# Altium PCB Mainboard.PcbDoc
Units mm, origin at the board's own origin, x right, y up, seen from the top; angles counter-clockwise.
Board outline 100.75 x 72.66 mm, 2 copper layers (Top Layer, Bottom Layer), stack 1.591 mm thick; 38 components, 40 nets, 176 pads, 22 vias.
Unrouted connection lines stored in the file: 1.
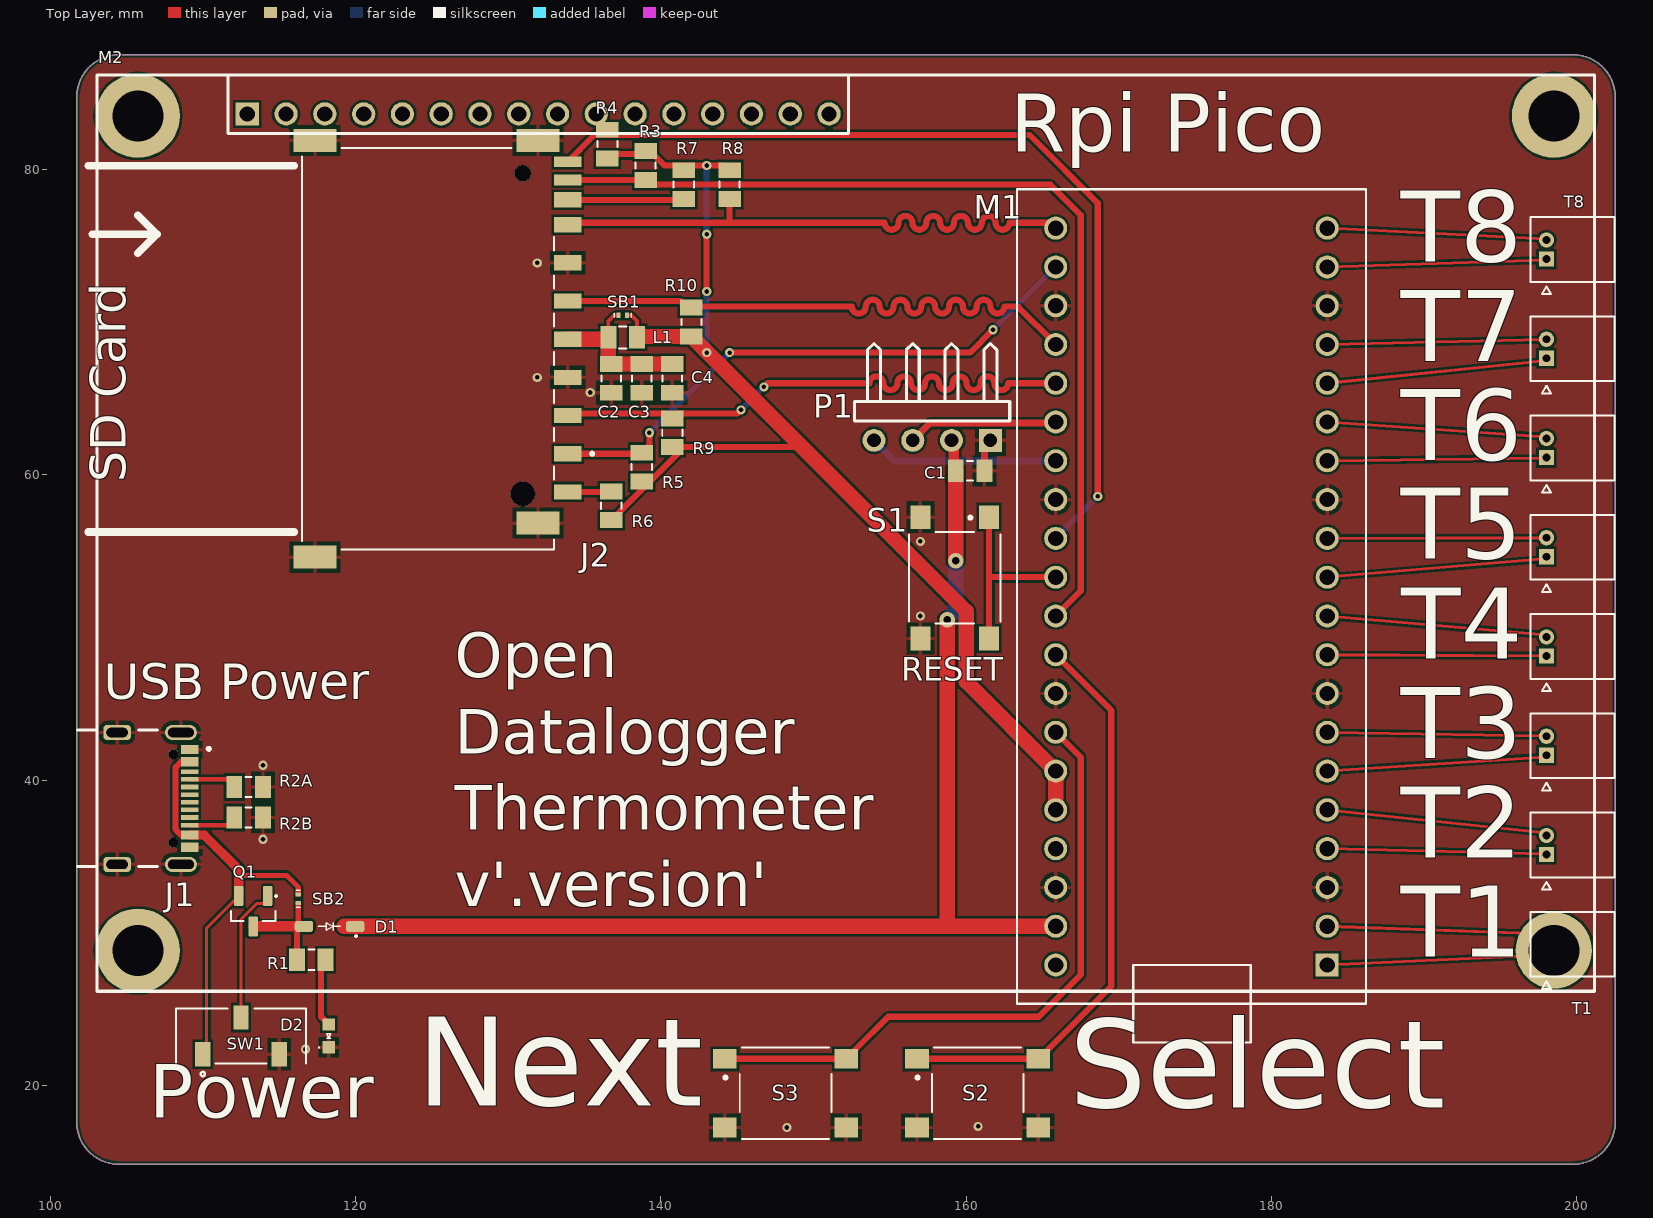
[diagram p0: Top Layer view]
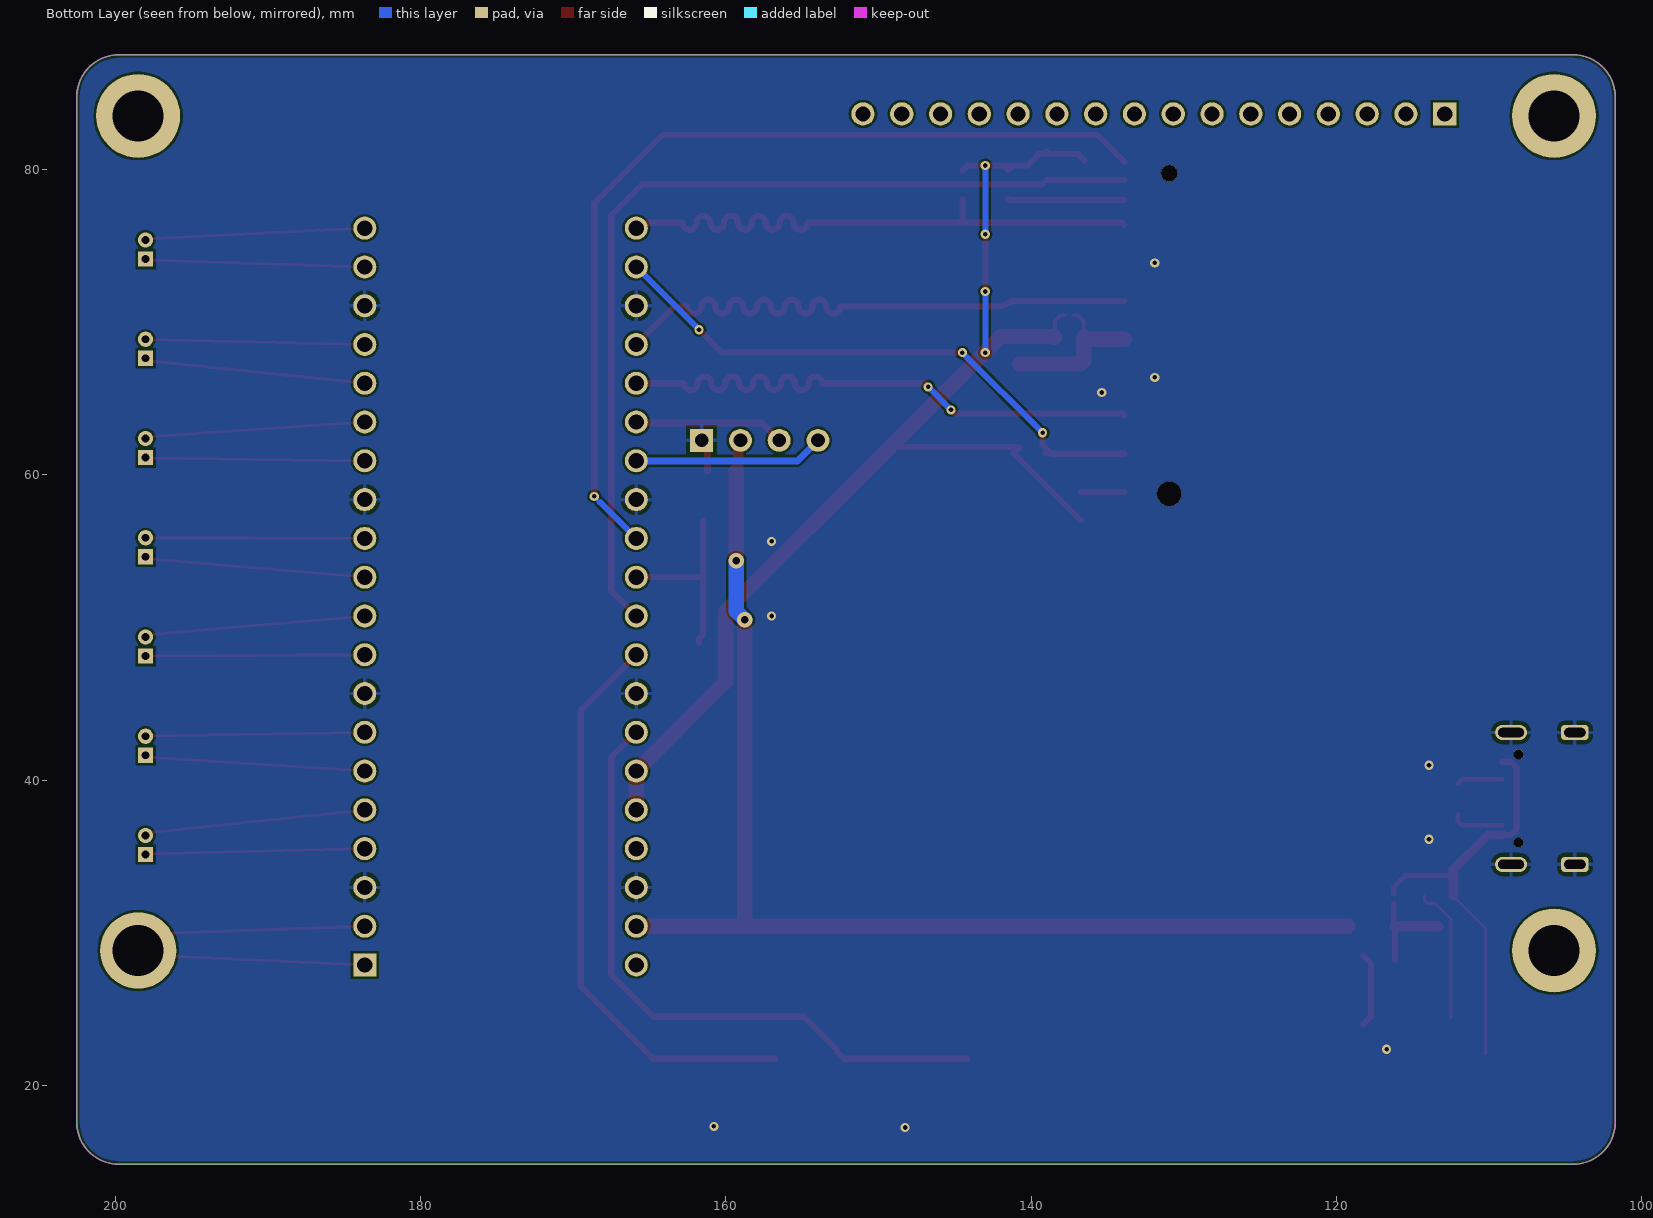
[diagram p1: Bottom Layer view, seen from below]

## Layer stack, top to bottom
Top Solder: solder mask 0.0102, Solder Resist, Dk 3.5
Top Layer: signal copper 0.0356
Dielectric 1: dielectric 1.52, FR-4, Dk 4.8
Bottom Layer: signal copper 0.0356
Bottom Solder: solder mask 0.0102, Solder Resist, Dk 3.5

## Board outline
101.75,17.59 ccw(c104.5,17.59) 104.5,14.84 199.75,14.84 ccw(c199.75,17.59) 202.5,17.59 202.5,84.75 ccw(c199.75,84.75) 199.75,87.5 104.5,87.5 ccw(c104.5,84.75) 101.75,84.75

## Design rules (kind name [scope] priority, off if disabled: settings)
Clearance [All] p1: gap=0.152 ignorepadtopadclearanceinfootprint=FALSE except(0: Arc-Hole Track-Hole SMDPad-Hole THPad-Hole Via-Hole Fill-Hole Poly-Hole Region-Hole Text-Hole)
HoleSize [All] p1: absolutevalues=TRUE maxlimit=6.2 minlimit=0.3 maxpercent=80.000 minpercent=20.000
MatchedLengths MatchedLengthsSPI [InNetClass('SPI')] p1: tolerance=1 checknetsindiffpair=FALSE checkdiffpairvsdiffpair=TRUE checkxsignals=TRUE checkothers=TRUE
MinimumSolderMaskSliver [All] p1: minsoldermaskwidth=0.1
PolygonConnect ViaConnect [IsVia] p1: connectstyle=Direct reliefconductorwidth=0.254 reliefentries=4 polygonreliefangle="90 Angle" airgapwidth=0.254
PolygonConnect [All] p2: connectstyle=Relief reliefconductorwidth=0.254 reliefentries=4 polygonreliefangle="90 Angle" airgapwidth=0.254
RoutingVias [All] p1: holewidth=0.3 width=0.6 viastyle="Through Hole" minholewidth=0.3 minwidth=0.5 maxholewidth=1 maxwidth=5
SilkToSilkClearance [All] p1: silktosilkclearance=0.1
SilkToSolderMaskClearance [IsPad] p1: minsilkscreentomaskgap=0.1 clearancetoexposedcopper=TRUE
SolderMaskExpansion [All] p1: expansion=0.051 istentingtop=FALSE
Width [All] p1: maxlimit=25.4 minlimit=0.15 preferedwidth=0.3
26 further rules are at their usual default settings.

## Classes and differential pairs
net class SPI: SD_CS SD_MISO SD_MOSI SD_SCK
component class 1: T1 "T 1"
component class 2: T2
component class 3: T3
component class 4: T4
component class 5: T5
component class 6: T6
component class 7: T7
component class 8: T8
component class Mainboard: C1 C2 C3 C4 D1 D2 "Disp I2C" J1 J2 L1 M1 M2 P1 Q1 R1 R2A R2B R3 R4 R5 R6 R7 R8 R9 R10 S1 S2 S3 SB1 SB2 SW1
net class VN[1..8]: VN1 VN2 VN3 VN4 VN5 VN6 VN7 VN8
net class VP[1..8]: VP1 VP2 VP3 VP4 VP5 VP6 VP7 VP8
channel class "LMT01 Interface": 1 2 3 4 5 6 7 8

## Components (designator, comment, footprint, x,y, rotation, side; value= is the part's Value field where it differs from the comment)
C1 "22uF" CAPACITOR_0805_2012M-70N 160.25,60.25 r180 top
C2 "22uF" CAPACITOR_0805_2012M-70N 136.75,66.31 r90 top
C3 "22uF" CAPACITOR_0805_2012M-70N 138.75,66.31 r90 top
C4 "22uF" CAPACITOR_0805_2012M-70N 140.75,66.31 r90 top
D1 "SS0520_R1_00001" SOD123-1.35mm-N 118.306,30.415 r180 top
D2 "LTST-C190 Series" LED_0603_1608M_0.80mm 118.25,23.25 r90 top
J1 "USB4105-GF-A" GCT_USB4105-GF-A 104.39,38.799 r270 top
J2 "SD-4-B" CUI_SD-4-B 124.75,68.25 r270 top
L1 "22u" CAPACITOR_0805_2012M-70N 137.5,69 r180 top
M1 "RASPBERRY_PI_PICO" RASPBERRY_PI_PICO_SOCKETED 174.75,50.75 r180 top
M2 "LCD2004" LCD2004 201.152,86.167 r180 top
P1 "Display I2C" HDR1X4H 161.58,62.25 r180 top
Q1 "SSM3J328R,LF" SOT23F-3-0.8mm 113.301,31.413 r270 top
R1 "1k" Resistor_0805_2012M-50N 117.108,28.233 r0 top
R2A "5.1k" Resistor_0805_2012M-50N 113,39.55 r180 top
R2B "5.1k" Resistor_0805_2012M-50N 113,37.55 r180 top
R3 "47k" Resistor_0805_2012M-50N 139,80.25 r90 top
R4 "47k" Resistor_0805_2012M-50N 136.5,81.65 r270 top
R5 "47k" Resistor_0805_2012M-50N 138.75,60.5 r270 top
R6 "47k" Resistor_0805_2012M-50N 136.75,57.966 r270 top
R7 "47k" Resistor_0805_2012M-50N 141.5,79 r90 top
R8 "47k" Resistor_0805_2012M-50N 144.5,79 r90 top
R9 "47k" Resistor_0805_2012M-50N 140.75,62.75 r270 top
R10 "47k" Resistor_0805_2012M-50N 142,70 r270 top
S1 "PTS645SL43SMTR92LFS" SW_PTS645SL43SMTR92LFS 159.25,53.25 r270 top
S2 "PTS645SL43SMTR92LFS" SW_PTS645SL43SMTR92LFS 160.75,19.5 r0 top
S3 "PTS645SL43SMTR92LFS" SW_PTS645SL43SMTR92LFS 148.165,19.5 r0 top
SB1 "Solder Jumper Normally Open 0201" "Solder Bridge Open 0201" 137.5,70.45 r180 top
SB2 "Solder Jumper Normally Open 0201" "Solder Bridge Open 0201" 116.25,32.225 r90 top
SW1 "JS102011JCQN" SW_JS102011JCQN 112.5,23.25 r0 top
T1 "0530480210" MOLEX_0530480210 198,29.25 r270 top (schematic designator T)
T2 "0530480210" MOLEX_0530480210 198,35.75 r270 top (schematic designator T)
T3 "0530480210" MOLEX_0530480210 198,42.25 r270 top (schematic designator T)
T4 "0530480210" MOLEX_0530480210 198,48.75 r270 top (schematic designator T)
T5 "0530480210" MOLEX_0530480210 198,55.25 r270 top (schematic designator T)
T6 "0530480210" MOLEX_0530480210 198,61.75 r270 top (schematic designator T)
T7 "0530480210" MOLEX_0530480210 198,68.25 r270 top (schematic designator T)
T8 "0530480210" MOLEX_0530480210 198,74.75 r270 top (schematic designator T)

## Footprints (in the part's own frame and the unit in brackets; to place one, negate y for a bottom-side part, rotate by r counter-clockwise, add the part's x,y. Pads: shape width x height; smd on the part's side, far side on the other; paste and mask are expansions set on the pad)
CAPACITOR_0805_2012M-70N [mm] "Capacitor, 0805 (2012 metric), 0.7mm high, nominal pads,"
  rect 1.04x1.47 smd mask+0.051: 1(-0.94,0) 2(0.94,0)
  silkscreen extent -0.2,-0.64 0.2,0.63, body extent -1,-0.73 1,0.73, height 1.23
CUI_SD-4-B [mm]
  rect 1x1.8 smd: 1(6.875,9.15) 2(4.375,9.15) 3(1.875,9.15) 4(-0.625,9.15) 5(-3.125,9.15) 6(-5.625,9.15) 7(-8.125,9.15) 8(-9.755,9.15) 9(9.375,9.15)
  rect 0.7x1.8 smd: 10(-11.055,9.15) 11(-12.255,9.15)
  rect 1.5x2.8 smd: G1(-13.65,7.2) G2(11.42,7.2) G3(-13.65,-7.4) G4(13.65,-7.4)
  round 1.1 hole 1.1 unplated: ""(-11.5,6.2)
  round 1.6 hole 1.6 unplated: ""(9.5,6.2)
  silkscreen extent -13.15,-8.25 13.15,10.85, body extent -13.75,-8.63 13.75,9.27, height 3.17
GCT_USB4105-GF-A [mm]
  rect 0.6x1.15 smd: A1_B12(-3.2,4.755) A4_B9(-2.4,4.755) B1_A12(3.2,4.755) B4_A9(2.4,4.755)
  rect 0.3x1.15 smd: A5(-1.25,4.755) A6(-0.25,4.755) A7(0.25,4.755) A8(1.25,4.755) B5(1.75,4.755) B6(0.75,4.755) B7(-0.75,4.755) B8(-1.75,4.755)
  oval 1x2.1 hole 0.6 slot 1.7 at 90 deg: SH1(-4.32,4.18) SH2(4.32,4.18)
  rrect50% 1x1.8 hole 0.6 slot 1.4 at 90 deg: SH3(-4.32,0) SH4(4.32,0)
  round 0.65 hole 0.65 unplated: ""(-2.89,3.68) ""(2.89,3.68)
  silkscreen extent -4.47,-2.6 4.47,6.1, body extent -4.47,-2.6 4.47,5.11, height 3.31
HDR1X4H [mm] "Connector; Header; 4 Position; Right Angle"
  rect 1.5x1.5 hole 0.9: 1(0,0)
  round 1.5 hole 0.9: 2(2.54,0) 3(5.08,0) 4(7.62,0)
  silkscreen extent -1.27,-6.35 8.89,-1.27
LCD2004 [mil]
  rect 60x60 hole 39.37: 1(3473.98,100)
  round 60 hole 39.37: 2(3373.98,100) 3(3273.98,100) 4(3173.98,100) 5(3073.98,100) 6(2973.98,100) 7(2873.98,100) 8(2773.98,100) 9(2673.98,100) 10(2573.98,100) 11(2473.98,100) 12(2373.98,100) 13(2273.98,100) 14(2173.98,100) 15(2073.98,100) 16(1973.98,100)
  round 196.85 hole 132.01 unplated: MH1(105,2256.97) MH1(105,105) MH1(3755.98,2256.97) MH1(3755.98,105)
  silkscreen extent 0,0 3861,2362, body extent 0,0 3861,2360, height 1033
LED_0603_1608M_0.80mm [mm] "LED, 0603 (1608 metric), 0.8mm high"
  rect 0.8x0.8 smd mask+0.051: A(0.75,0) C(-0.75,0)
  silkscreen extent -0.79,-0.12 0.13,0.66, body extent -0.8,-0.4 0.8,0.4, height 0.8
MOLEX_0530480210 [mm]
  rect 1x1 hole 0.5 mask+0.051: 1(0.625,0)
  round 1 hole 0.5 mask+0.051: 2(-0.625,0)
  silkscreen extent -2.12,-1.05 2.92,4.45, body extent -2.13,-1.08 2.12,4.42, height 3.56
RASPBERRY_PI_PICO_SOCKETED [mm]
  round 1.508 hole 1: 3V3(8.89,12.7) 3V3_EN(8.89,15.24) ADC_VREF(8.89,10.16) AGND(8.89,5.08) GND(8.89,17.78) GND2(8.89,-7.62) GND3(8.89,-20.32) GND4(-8.89,17.78) GND5(-8.89,5.08) GND6(-8.89,-7.62) GND7(-8.89,-20.32) GP1(-8.89,20.32) GP2(-8.89,15.24) GP3(-8.89,12.7) GP4(-8.89,10.16) GP5(-8.89,7.62) GP6(-8.89,2.54) GP7(-8.89,0) GP8(-8.89,-2.54) GP9(-8.89,-5.08) GP10(-8.89,-10.16) GP11(-8.89,-12.7) GP12(-8.89,-15.24) GP13(-8.89,-17.78) GP14(-8.89,-22.86) GP15(-8.89,-25.4) GP16(8.89,-25.4) GP17(8.89,-22.86) GP18(8.89,-17.78) GP19(8.89,-15.24) GP20(8.89,-12.7) GP21(8.89,-10.16) GP22(8.89,-5.08) GP26_A0(8.89,0) GP27_A1(8.89,2.54) GP28_A2(8.89,7.62) RUN(8.89,-2.54) VBUS(8.89,22.86) VSYS(8.89,20.32)
  rect 1.508x1.508 hole 1: GP0(-8.89,22.86)
  silkscreen extent -11.43,-27.94 11.43,27.94, body extent -10.5,-26.92 10.5,25.2, height 11.13
Resistor_0805_2012M-50N [mm] "Resistor, 0805 (2012 metric), nominal pads"
  rect 1.04x1.47 smd mask+0.051: 1(-0.94,0) 2(0.94,0)
  silkscreen extent -0.2,-0.66 0.2,0.66, body extent -1,-0.63 1,0.62, height 0.5
SOD123-1.35mm-N [mm] "SOD-123, 1.35mm high, nominal pads"
  rrect50% 1.21x0.73 smd mask+0.051: A(1.68,0) C(-1.68,0)
  silkscreen extent -1.75,-0.25 0.74,0.66, body extent -1.83,-0.78 1.82,0.77, height 1.5
"Solder Bridge Open 0201" [mm]
  rect 0.25x0.35 smd paste-100 mask+0: 1(-0.275,0) 2(0.275,0)
  silkscreen extent -0.55,-0.13 0.55,0.12
SOT23F-3-0.8mm [mm] "SOT23, 3-pin, flat leads, 0.8mm high"
  rrect25% 1.32x0.6 smd mask+0.051: 1(-1,0.95) 2(-1,-0.95) 3(1,0)
  silkscreen extent -1.02,-1.45 0.65,1.52, body extent -1.2,-1.4 1.2,1.4, height 0.88
SW_JS102011JCQN [mm]
  rect 1x1.6 smd: 1(-2.5,-1.2) 2(0,1.2) 3(2.5,-1.2)
  silkscreen extent -4.25,-2.64 4.25,1.8, body extent -4.25,-2 4.25,2, height 5.35
SW_PTS645SL43SMTR92LFS [mm]
  rect 1.55x1.3 smd: 1(-3.975,2.25) 2(3.975,2.25) 3(-3.975,-2.25) 4(3.975,-2.25)
  silkscreen extent -4.04,-3 3,3, body extent -4,-3 4,3, height 4.3

## Part data
C1: library part C0805C226M9PACTU, "Passive - Capacitor, X5R, 22uF Max, 6.3V, 0805 (2012 Metric), ±20%, -55°C ~ 85°C. 8.8uF @ 5V", Capacitance at Rated Voltage=30%, Package=0805, Rated Voltage=6.3V, Supplier 1 Part No.=399-C0805C226M9PAC7800CT-ND, Temperature Coefficient=X5R, Temp Range="-55°C ~ 85°C", Tolerance=±20%, APSS Standard Part="APSS Standard", MF Part No.=C0805C226M9PACTU, Supplier 1=Digikey
C2 C3 C4: library part GRM21BR61C226ME44L, "Passive - Capacitor, X5R, 22uF Max, 16V, 0805 (2012 Metric), ±20%, -55°C ~ 85°C. 9.4uF @ 5V, 3.2uF @ 15V, 1.9uF @ 25V", Capacitance at Rated Voltage=10%, Package=0805, Rated Voltage=16V, Supplier 1 Part No.=490-10747-1-ND, Temp Range="-55°C ~ 85°C", Temperature Coefficient=X5R, Tolerance=±20%, APSS Standard Part="APSS Standard", MF Part No.=GRM21BR61C226ME44L, Supplier 1=Digikey
D1: "Diode - Low Forward Voltage, Schottky, 385 mV @ 500 mA, 75 µA Reverse @ 10 V, SOD-123", Package=SOD-123, Rated Voltage="20V Reverse", Supplier 1 Part No.=3757-SS0520_R1_00001CT-ND, Temp Range="-55°C ~ 125°C", APSS Standard Part="APSS Standard", MF Part No.=SS0520_R1_00001, Supplier 1=Digikey
D2: "Diode - LED, 0603", Colour=Red, MF Part No.=LTST-C190KAKT, Package=0603, Rated Voltage="5V Reverse", Temp Range="-30°C ~ 85°C", APSS Standard Part="APSS Standard", Supplier 1=Digikey
J1: "Header - USB-C 2.0 Receptacle Connector 24 (16+8 Dummy) Position Surface Mount, Right Angle; Through Hole", Rated Voltage=48VDC, Supplier 1 Part No.=2073-USB4105-GF-ACT-ND, Temp Range="-40°C ~ 85°C", APSS Standard Part="APSS Standard", MF Part No.=USB4105-GF-A, Supplier 1=Digikey
J2: "SD Card Connector, 11 Positions, Connector, Push In, Pull Out, Surface Mount, 2.8 mm Height Above Board, Gold Flash", Supplier 1 Part No.=2223-Sd-4-BCT-ND, Check_prices=https://www.snapeda.com/parts/SD-4-B/CUI+Devices/view-part/?ref=eda, CUI_purchase_URL=https://www.cuidevices.com/product/interconnect/connectors/memory-card-connectors/sd-card-connectors/sd-4-b?utm_source=snapeda.com&utm_medium=referral&utm_campaign=snapedaBOM, MF="CUI Devices", MF Part No.=SD-4-B, MP=SD-4-B, SnapEDA_Link=https://www.snapeda.com/parts/SD-4-B/CUI+Devices/view-part/?ref=snap, Supplier 1=Digikey
L1: library part "Generic Inductor", "Passive - Inductor, Generic", Package=0805, Supplier 1=Digikey
M1: "Raspberry Pi Board, Arm Cortex-M0+; Core Architecture:Arm; Core Sub-Architecture:Cortex-M0+; Kit Contents:Raspberry Pi Pico Board; No. Of Bits:32Bit; Silicon Core Number:Rp2040; Silicon Manufacturer:Raspberry Pi", MF Part No.=SC0917, Supplier 1 Part No.=2648-SC0917-ND, Check_prices=https://www.snapeda.com/parts/RASPBERRY%20PI%20PICO/Raspberry+Pi/view-part/?ref=eda, MF="Raspberry Pi", MP="RASPBERRY PI PICO", SnapEDA_Link=https://www.snapeda.com/parts/RASPBERRY%20PI%20PICO/Raspberry+Pi/view-part/?ref=snap, Supplier 1=Digikey
M2: MF Part No.=CN0296D, Supplier 1 Part No.=4411-CN0296D-ND, Supplier 1=Digikey
P1: library part "Header 4H", "Header, 4-Pin, Right Angle", LatestRevisionDate=17-Jul-2002, LatestRevisionNote="Re-released for DXP Platform.", Publisher="Altium Limited", Supplier 1=Digikey
Q1: "Transistor - MOSFET, P-Channel SSM3J328R,LF", Package=SOT23-3, Power=1W, Rated Voltage="20 Vds", Supplier 1 Part No.=SSM3J328RLFCT-ND, Temp Range="0°C ~ 150°C (TJ)", APSS Standard Part="APSS Standard", MF Part No.=SSM3J328R,LF, Supplier 1=Digikey
R1: library part "RMCF0805JT Series", "Passive - Resistor Series, 0805, 5%, 100m - 22M, E24, 0.063W, 1/16W, ±200ppm/°C, -55°C ~ 155°C, 0805 (2012 Metric)", MF Part No.=RMCF0805JT1K00, Package=0805, Power=1/8W, Rated Voltage=150V, Supplier 1 Part No.=RMCF0805JT1K00CT-ND, Temp Range="-55°C ~ 155°C", Temperature Coefficient=±200ppm/°C, Tolerance=5%, Value Range="100m ~ 22M", APSS Standard Part="APSS Standard", E Series=E24, Supplier 1=Digikey
R2A R2B: library part "RMCF0805JT Series", "Passive - Resistor Series, 0805, 5%, 100m - 22M, E24, 0.063W, 1/16W, ±200ppm/°C, -55°C ~ 155°C, 0805 (2012 Metric)", MF Part No.=RMCF0805JT5K10, Package=0805, Power=1/8W, Rated Voltage=150V, Supplier 1 Part No.=RMCF0805JT5K10CT-ND, Temp Range="-55°C ~ 155°C", Temperature Coefficient=±200ppm/°C, Tolerance=5%, Value Range="100m ~ 22M", APSS Standard Part="APSS Standard", E Series=E24, Supplier 1=Digikey
R3 R4 R5 R6 R7 R8 R9 R10: library part "RMCF0805JT Series", "Passive - Resistor Series, 0805, 5%, 100m - 22M, E24, 0.063W, 1/16W, ±200ppm/°C, -55°C ~ 155°C, 0805 (2012 Metric)", MF Part No.=RMCF0805JT47K0, Package=0805, Power=1/8W, Rated Voltage=150V, Supplier 1 Part No.=RMCF0805JT47K0CT-ND, Temp Range="-55°C ~ 155°C", Temperature Coefficient=±200ppm/°C, Tolerance=5%, Value Range="100m ~ 22M", APSS Standard Part="APSS Standard", E Series=E24, Supplier 1=Digikey
S1 S2 S3: "Switch - SPST, Momentary, Normally Open, 50mA @ 12VDC", MF Part No.=SW_PTS645SL43SMTR92LFS, Rated Voltage="250V AC", Supplier 1 Part No.=CKN10880CT-ND, Temp Range="-40°C ~ 85°C", APSS Standard Part="APSS Standard", Mounting Type="Surface Mount", Supplier 1=Digikey
SW1: "Switch Slide Spdt 300ma 6v", Package=None, Availability=Unavailable, MP=JS102011JCQN, Price=None
T1 T2 T3 T4 T5 T6 T7 T8: "Header - Picoblade 02-pin, TH, RA", Supplier 1 Part No.=530480210, APSS Standard Part="APSS Standard", MF Part No.=0530480210, Mounting Type=Through-hole, Orientation="Right Angle", Pins=2, Pitch=1.25mm, Supplier 1=Digikey
SB1 SB2: DEBUG=DEBUG

## Free pads (board coordinates)
  round 5.5 hole 3.353: MH(105.75,28.84) MH(105.75,83.5) MH(198.485,83.5)

## Via types
v1: diameter 0.6, hole 0.3, Top Layer to Bottom Layer, tented both sides, 19 vias
v2: diameter 1, hole 0.5, Top Layer to Bottom Layer, tented both sides, 2 vias
v3: diameter 0.6, hole 0.3, Top Layer to Bottom Layer, 1 vias

## Nets (pads, with @x,y where several pads share a name; then routed paths per layer and width w, separated by ;. In a path a pad name is that pad's centre, name@x,y a point inside that pad or via, vN(x,y) a via of type N, cw(c..) or ccw(c..) an arc to the next point about the centre after c; other vN are vias at no path point)
3V3: L1.1 M1.3V3 M1.ADC_VREF R3.2 R4.2 R5.2 R6.2 R7.2 R8.2 R9.2 R10.2 SB1.1 | length 83.8
  Top Layer w0.25: SB1.1 138.05,70.45 138.44,70.06 L1.1
  Top Layer w0.4: R4.2@136.5,80.56 136.94,81 R3.2@138.81,81 ; R6.2 138.094,58.37 141.142,61.418 R9.2 149.25,61.81 ; R3.2 R3.2@138.81,81 ; v1(143,72) v1(143,75.75) ; R8.2 144.19,80.25 v1(143,80.25) R7.2@141.81,80.25 ; R3.2@138.81,81 139.5,81 140.25,80.25 R7.2@141.19,80.25 ; R7.2@141.19,80.25 R7.2@141.81,80.25 ; R7.2@141.19,80.25 R7.2 R7.2@141.81,80.25
  Top Layer w1: L1.1 138.5,69.06 R10.2 146.233,64.827 ; 146.333,64.727 146.233,64.827 ; M1.3V3 M1.ADC_VREF 160,46.45 160,51.06 149.25,61.81 147.891,63.169 146.233,64.827
  Bottom Layer w0.4: v1(143,68) v1(143,72) ; v1(143,75.75) v1(143,80.25)
Disp_SCL: M1.GP21 P1.4 | length 12.5
  Bottom Layer w0.45: P1.4 155.3,60.91 M1.GP21
Disp_SDA: M1.GP20 P1.3 | length 9.9
  Top Layer w0.45: P1.3 157.627,63.377 159.507,63.377 160.674,63.377 162.486,63.377 165.787,63.377 M1.GP20
GND: C1.1 C2.1 C3.1 C4.1 D2.C J1.A1_B12 J1.B1_A12 J1.SH1 J1.SH2 J1.SH3 J1.SH4 J2.3 J2.6 J2.G1 J2.G2 J2.G3 J2.G4 M1.AGND M1.GND M1.GND2 M1.GND3 M1.GND4 M1.GND5 M1.GND6 M1.GND7 P1.1 R2A.1 R2B.1 S1.3 S1.4 S2.3 S2.4 S3.3 S3.4 SW1.3 | length 2.2
  Top Layer w0.45: C1.1 161.19,61.86 P1.1
  other v1: 148.25,17.25 160.776,17.324 116.72,22.37 113.945,36.123 113.945,40.975 157,50.75 156.998,55.629 135.379,65.387 131.9,66.375 131.9,73.875
NetD1_A: D1.A Q1.3 R1.1 SB2.1 | length 6.6
  Top Layer w0.35: D1.A@116.25,30.58 SB2.1@116.25,31.898
  Top Layer w0.4: R1.1 116.168,30.198 116.25,30.279 D1.A@116.25,30.58
  Top Layer w0.6: Q1.3 Q1.3@113.384,30.413
  Top Layer w0.7: Q1.3@113.384,30.413 113.393,30.421 D1.A@116.194,30.421
NetD2_A: D2.A R1.2 | length 4.9
  Top Layer w0.4: D2.A 117.75,24.5 117.75,28 R1.2@118.25,28.5
NetJ1_A5: J1.A5 R2A.2 | length 3
  Top Layer w0.3: J1.A5 111.761,40.049 R2A.2@112.06,39.75
NetJ1_B5: J1.B5 R2B.2 | length 3.5
  Top Layer w0.3: J1.B5 111.799,37.049 112.06,37.31 R2B.2 R2B.2@112.06,37.75
NetQ1_1: Q1.1 SW1.2 | length 9
  Top Layer w0.2: SW1.2 112.5,30.884 113.543,31.928 114.051,31.928 114.251,32.128 Q1.1
Next: M1.GP28_A2 S3.1 S3.2 | length 42.2
  Top Layer w0.4: S3.1 152.265,21.75 152.715,22.2 152.715,22.325 154.89,24.5 164.75,24.5 167.5,27.25 167.5,41.49 M1.GP28_A2
Reset: M1.RUN S1.1 S1.2 | length 12.7
  Top Layer w0.4: S1.1@161.5,56.975 161.5,53.29 ; S1.2@161.75,49.025 161.735,49.289 161.61,49.399 161.5,49.497 161.5,53.29 ; M1.RUN@165.65,53.5 M1.RUN 161.5,53.29
SD_CardDetect: J2.10 M1.GP26_A0 R3.1 | length 61.1
  Top Layer w0.4: J2.10 138.995,79.305 R3.1 ; R3.1@139.25,79 165.5,79 167.5,77 167.5,52.39 M1.GP26_A0
SD_CS: J2.1 M1.GP17 R5.1 | length 37.8
  Top Layer w0.4: J2.1 138.685,61.375 R5.1 ; R5.1@139.065,61.44 R5.1 ; v1(139.25,62.75) 139.25,61.94 R5.1 ; v1(144.5,68) 160.25,68 v1(161.75,69.5)
  Bottom Layer w0.4: v1(139.25,62.75) v1(144.5,68) ; v1(161.75,69.5) M1.GP17
SD_MISO: J2.7 M1.GP16 R8.1 | length 38.4
  Top Layer w0.4: J2.7 134.025,76.5 144.5,76.5 ; R8.1 144.5,76.5 ; M1.GP16 165.51,76.5 163.75,76.5 163.738,76.5 162.83,76.5 cw(c162.376,76.5) 161.922,76.5 ccw(c161.468,76.5) 161.014,76.5 cw(c160.56,76.5) 160.106,76.5 ccw(c159.652,76.5) 159.198,76.5 cw(c158.744,76.5) 158.29,76.5 ccw(c157.836,76.5) 157.382,76.5 cw(c156.928,76.5) 156.474,76.5 ccw(c156.02,76.5) 155.566,76.5 cw(c155.112,76.5) 154.658,76.5 153.75,76.5 144.5,76.5
SD_MOSI: J2.2 M1.GP19 R9.1 | length 38
  Top Layer w0.4: J2.2 134.025,64 145,64 v1(145.25,64.25) ; v1(146.75,65.75) 146.99,65.99 153.25,65.99 153.67,65.99 cw(c154.124,65.99) 154.578,65.99 ccw(c155.032,65.99) 155.486,65.99 cw(c155.94,65.99) 156.394,65.99 ccw(c156.848,65.99) 157.302,65.99 cw(c157.756,65.99) 158.21,65.99 ccw(c158.664,65.99) 159.118,65.99 cw(c159.572,65.99) 160.026,65.99 ccw(c160.48,65.99) 160.934,65.99 cw(c161.388,65.99) 161.842,65.99 ccw(c162.296,65.99) 162.75,65.99 M1.GP19
  Bottom Layer w0.4: v1(145.25,64.25) v1(146.75,65.75)
SD_PWR: C2.2 C3.2 C4.2 J2.4 L1.2 SB1.2 | length 10.4
  Top Layer w0.25: L1.2 136.56,70.06 136.95,70.45 SB1.2
  Top Layer w0.4: L1.2@136.435,68.875 L1.2 ; C2.2@136.56,67.44 C2.2
  Top Layer w1: J2.4 L1.2@136.435,68.875 ; C2.2@136.56,67.44 L1.2 ; C2.2 C3.2 C4.2
SD_SCK: J2.5 M1.GP18 R10.1 | length 38.8
  Top Layer w0.4: J2.5 141.209,71.375 142,71.01 151.75,71.01 152.512,71.01 ccw(c152.966,71.01) 153.42,71.01 cw(c153.874,71.01) 154.328,71.01 ccw(c154.782,71.01) 155.236,71.01 cw(c155.69,71.01) 156.144,71.01 ccw(c156.598,71.01) 157.052,71.01 cw(c157.506,71.01) 157.96,71.01 ccw(c158.414,71.01) 158.868,71.01 cw(c159.322,71.01) 159.776,71.01 ccw(c160.23,71.01) 160.684,71.01 cw(c161.138,71.01) 161.592,71.01 ccw(c162.046,71.01) 162.5,71.01 163.38,71.01 M1.GP18
SD_Unused1: J2.8 R7.1 | length 7.6
  Top Layer w0.4: J2.8 141.445,78.005 R7.1
SD_Unused2: J2.9 R6.1 | length 2.9
  Top Layer w0.4: J2.9 136.719,58.875 R6.1
SD_WriteProtect: J2.11 M1.GP22 R4.1 | length 59.9
  Top Layer w0.4: J2.11 135.645,82.25 164.15,82.25 168.609,77.791 v3(168.609,58.579)
  Bottom Layer w0.4: M1.GP22 168.25,58.22
Select: M1.GP27_A1 S2.1 S2.2 | length 37.9
  Top Layer w0.4: S2.1 S2.2 164.75,21.75 169.5,26.5 169.5,44.57 M1.GP27_A1
VN1: M1.GP1 T1.2 | length 14.4
  Top Layer w0.2: M1.GP1 T1.2@198.002,29.927
VN2: M1.GP3 T2.2 | length 14.5
  Top Layer w0.2: M1.GP3 T2.2@198.016,36.532
VN3: M1.GP5 T3.2 | length 14.4
  Top Layer w0.2: M1.GP5 T3.2@198,42.899
VN4: M1.GP7 T4.2 | length 14.4
  Top Layer w0.2: M1.GP7 T4.2@198.011,49.504
VN5: M1.GP9 T5.2 | length 14.4
  Top Layer w0.2: M1.GP9 T5.2@198,55.871
VN6: M1.GP11 T6.2 | length 14.4
  Top Layer w0.2: M1.GP11 T6.2@198.007,62.476
VN7: M1.GP13 T7.2 | length 14.4
  Top Layer w0.2: M1.GP13 T7.2@198.001,68.842
VN8: M1.GP15 T8.2 | length 14.4
  Top Layer w0.2: M1.GP15 T8.2@198.004,75.448
VP1: M1.GP0 T1.1 | length 14.4
  Top Layer w0.2: M1.GP0 T1.1@198.003,28.556
VP2: M1.GP2 T2.1 | length 14.4
  Top Layer w0.2: M1.GP2 T2.1@198.001,35.161
VP3: M1.GP4 T3.1 | length 14.4
  Top Layer w0.2: M1.GP4 T3.1@198.006,41.528
VP4: M1.GP6 T4.1 | length 14.4
  Top Layer w0.2: M1.GP6 T4.1@198,48.133
VP5: M1.GP8 T5.1 | length 14.4
  Top Layer w0.2: M1.GP8 T5.1@198.011,54.5
VP6: M1.GP10 T6.1 | length 14.4
  Top Layer w0.2: M1.GP10 T6.1@198,61.105
VP7: M1.GP12 T7.1 | length 14.5
  Top Layer w0.2: M1.GP12 T7.1@198.016,67.472
VP8: M1.GP14 T8.1 | length 14.4
  Top Layer w0.2: M1.GP14 T8.1@198.002,74.076
Vpico_bus: M1.VBUS
Vpower_bus: J1.A4_B9 J1.B4_A9 Q1.2 SB2.2 SW1.1 | length 27.8
  Top Layer w0.2: SW1.1@110.25,22.05 110.25,30.311 Q1.2
  Top Layer w0.35: 112.5,33.75 115.5,33.75 116.25,33 SB2.2@116.25,32.559
  Top Layer w0.4: J1.B4_A9 108.572,36.399 108.218,36.753 108.218,40.845 108.572,41.199 J1.A4_B9
  Top Layer w0.6: J1.B4_A9 110.101,36.399 112.351,34.149 Q1.2
Vsys: C1.2 D1.C M1.VSYS P1.2 | length 78.8
  Top Layer w0.7: P1.2 159.175,62.115 159.175,60.385 C1.2
  Top Layer w1: 119.25,30.43 119.562,30.43 158.75,30.43 ; v2(158.75,50.5) 158.75,30.43 ; v2(159.308,54.368) 159.31,54.37 C1.2 ; M1.VSYS 158.75,30.43
  Bottom Layer w1: v2(158.75,50.5) 159.308,51.058 v2(159.308,54.368)
pads on no net: J1. J1.A6 J1.A7 J1.A8 J1.B6 J1.B7 J1.B8 J2. M1.3V3_EN M2.1 M2.2 M2.3 M2.4 M2.5 M2.6 M2.7 M2.8 M2.9 M2.10 M2.11 M2.12 M2.13 M2.14 M2.15 M2.16 M2.MH1

## Polygon pours and split planes (outlines as drawn)
GND on Bottom Layer "GND Bottom" (solid, pour order 0): 101.75,87.5 202.5,87.5 202.5,14.84 101.75,14.84
GND on Top Layer "GND Top" (solid, pour order 2): 101.75,87.5 202.5,87.5 202.5,14.84 101.75,14.84

## Keep-outs
Keep-Out Layer:
  the board outline again, w0.1

## Silkscreen, mask and mechanical layers (free items; w line width, h text height)
Top Overlay:
  lines w0.5: 102.503,56.253 116,56.253 ; 102.503,80.247 116,80.247 ; 102.75,75.75 106.999,75.75 ; 105.75,74.5 106.999,75.749 ; 105.75,77 106.999,75.751
  text "T8" at 199.143,77.495 h0.8
  text "SD Card" at 105.75,59.5 h4 r90
  text "RESET" at 155.75,46.5 h1.52
  text "USB Power" at 103.5,44.5 h4
  text "Open / Datalogger / Thermometer / v'.version'" at 126.5,30.75 h5
  text "T1" at 199.66,24.66 h0.8
  text "Power" at 106.5,16.75 h6
  text "Next" at 124,16.75 h10
  text "Select" at 166.75,16.625 h10

## Text inside footprints (layer, text, board x,y; h text height)
J1: Mechanical 13 "PCB EDGE" at 101.99,40.199 h0.41 r270
M1: Top Overlay "Rpi Pico" at 162.87,79.897 h6.5